# Altium PCB ControlBoard.PcbDoc (part 2 of 2)
Units mil, origin at the board's own origin, x right, y up, seen from the top; angles counter-clockwise.
Board outline 3834.27 x 1968.5 mil, 4 copper layers (TOP, GND, POWER, BOTTOM), stack 23.756 mil thick; 135 components, 144 nets, 798 pads, 277 vias.
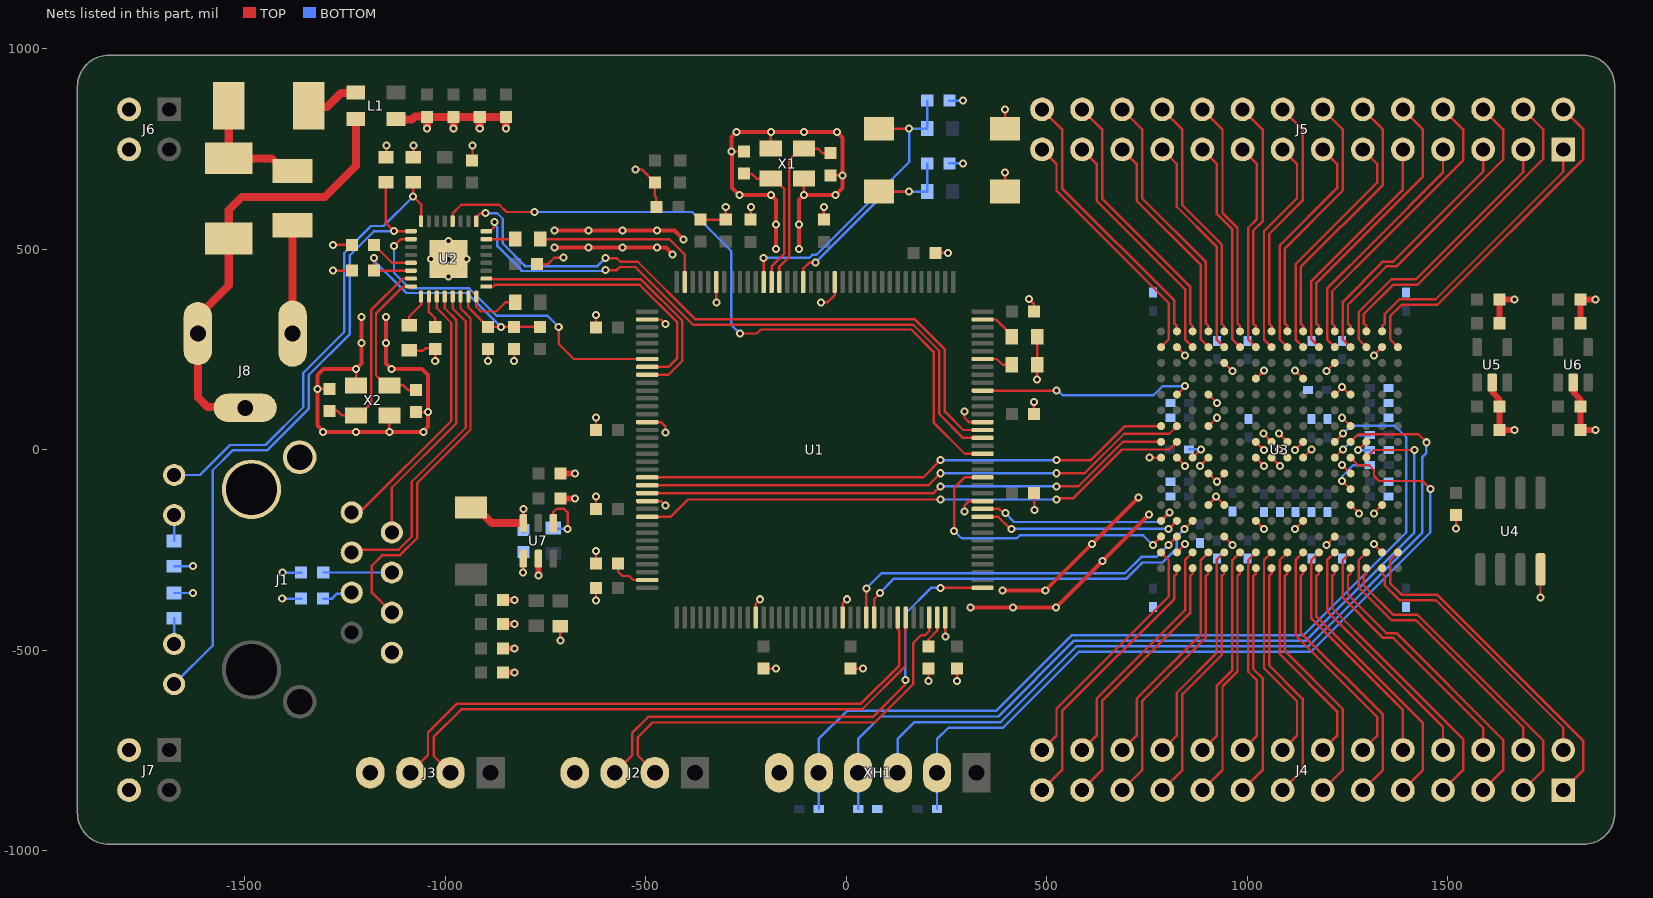
[diagram p4: the nets of this part, all layers, seen from the top]

## Via types
v1: diameter 20, hole 10, TOP to BOTTOM, tented both sides, 277 vias

## Nets (pads, with @x,y where several pads share a name; then routed paths per layer and width w, separated by ;. In a path a pad name is that pad's centre, name@x,y a point inside that pad or via, vN(x,y) a via of type N, cw(c..) or ccw(c..) an arc to the next point about the centre after c; other vN are vias at no path point) (continued)
FPGA_FSMC_DATA4: U1.58 U3.K16 | length 1334.6
  TOP w6: U1.58@-496.17,-68.9 192.33,-68.9 v1(235.38,-25.84) ; v1(524.56,-25.84) 610.43,-25.84 695.33,59.06 U3.K16@785.4,59.06
  BOTTOM w6: v1(235.38,-25.84) v1(524.56,-25.84)
FPGA_FSMC_DATA5: U1.59 U3.K15 | length 1382.1
  TOP w6: U1.59@-496.17,-88.58 205.41,-88.58 v1(235.38,-58.61) ; v1(524.56,-58.61) 594.64,-58.61 693.3,40.05 805.77,40.05 U3.K15@824.77,59.06
  BOTTOM w6: v1(235.38,-58.61) v1(524.56,-58.61)
FPGA_FSMC_DATA6: U1.60 U3.J16 | length 1334.6
  TOP w6: U1.60@-496.17,-108.27 218.03,-108.27 234.92,-91.38 v1(235.38,-91.38) ; v1(524.56,-91.38) 578.84,-91.38 689.91,19.69 U3.J16@785.4,19.69
  BOTTOM w6: v1(235.38,-91.38) v1(524.56,-91.38)
FPGA_FSMC_DATA7: U1.63 U3.J15 | length 1398.4
  TOP w6: U1.63@-496.17,-167.32 -438.04,-167.32 -394.86,-124.14 v1(235.38,-124.14) ; v1(524.56,-124.14) 527.24,-121.46 565.73,-121.46 687.88,0.68 805.77,0.68 U3.J15@824.77,19.68
  BOTTOM w6: v1(235.38,-124.14) v1(524.56,-124.14)
FPGA_NRST: U1.134 U3.M15 | length 548.5
  TOP w6: U1.134@340.44,147.64 v1(524.56,147.64) ; U3.M15@824.77,137.8 v1(845.51,158.54)
  BOTTOM w6: v1(524.56,147.64) 528.16,147.64 539.79,136 766,136 788.54,158.54 v1(845.51,158.54)
FSMC_NE1: U1.123 U3.C16 | length 735.2
  TOP w6: v1(269.14,-202.14) 269.14,-95.14 295.38,-68.9 U1.123@340.44,-68.9 ; v1(764.66,-237.28) U3.C16@785.4,-216.54
  BOTTOM w6: v1(269.14,-202.14) 288.14,-221.14 425.14,-221.14 433.14,-213.14 740.52,-213.14 v1(764.66,-237.28)
FSMC_NOE: U1.118 U3.D15 | length 507.8
  TOP w6: U1.118@340.44,-167.32 379.08,-167.32 409.66,-197.91 v1(411.77,-197.91) ; v1(804.03,-197.91) U3.D15@824.77,-177.17
  BOTTOM w6: v1(411.77,-197.91) 412.53,-197.14 v1@803.26,-197.14 ; v1@804.03,-195.2 v1@806.74,-195.2
FSMC_NWE: U1.119 U3.D16 | length 518.6
  TOP w6: U1.119@340.44,-147.64 381.39,-147.64 391.9,-158.14 v1(396.77,-158.14) ; v1@396.95,-157.96 v1@397.14,-158.14 ; U3.D16@785.4,-177.17 v1(806.14,-156.43)
  BOTTOM w6: v1(396.77,-158.14) 418.82,-180.2 782.37,-180.2 v1(806.14,-156.43)
GND: C1.1 C2.1 C3.1 C4.1 C6.2 C7.2 C8.1 C9.2 C10.2 C11.1 C12.1 C13.1 C14.1 C15.1 C16.1 C17.1 C18.1 C19.1 C20.2 C21.2 C22.1 C23.1 C24.2 C25.2 C26.1 C27.2 C28.1 C29.1 C30.1 C31.2 C32.1 C33.1 C34.1 C35.1 C36.1 C37.1 C38.1 C39.1 C40.1 C41.1 C42.1 C43.1 C44.1 C45.1 C46.1 C47.1 C48.1 C49.1 C50.1 C51.1 C52.1 C53.1 C54.1 C55.1 C56.1 C57.1 C58.1 C59.1 C60.1 C61.1 C62.1 C63.1 C64.1 C65.2 C66.1 C67.1 C68.1 C69.2 C70.1 C71.1 C72.1 C73.1 C74.1 C75.1 C76.1 C78.1 C79.1 C80.1 C81.1 C82.1 C83.1 C84.1 C85.2 C86.1 C87.2 J1.8 J1.13 J1.14 J2.4 J3.4 J6.2 J6.4 J7.2 J7.4 L1.3 R1.1 R2.1 R5.2 R6.2 R9.1 R12.2 R13.2 R17.1 R20.2 R21.1 S1.1 S2.1 U1.16 U1.31 U1.38 U1.51 U1.61 U1.83 U1.94 U1.107 U1.120 U1.130 U2.33 U3.B2 U3.B15 U3.C5 U3.C12 U3.D7 U3.D10 U3.E2 U3.E4 U3.E12 U3.E13 U3.G4 U3.G12 U3.G13 U3.H7 U3.H8 U3.H9 U3.H10 U3.H13 U3.H15 U3.H16 U3.J7 U3.J8 U3.J9 U3.J10 U3.K4 U3.K13 U3.M4 U3.M5 U3.M13 U3.N7 U3.N10 U3.P5 U3.P12 U3.R2 U3.R15 U4.4 U5.2 U6.2 U7.2 X1.2 X1.4 X2.2 X2.4 XH1.6 | length 8398.3
  TOP w6: v1(-1318.64,152.06) C84.1@-1288.09,152.06 ; v1(-1280.41,446.53) C87.2@-1232.14,446.53 ; v1(-1280.41,510.95) C25.2@-1232.14,510.95 ; X2.4@-1222,160.35 v1(-1222,201.69) ; R6.2@-1147.83,729.74 -1146.86,730.71 v1(-1146.86,758.86) ; v1(-1139.32,44.21) X2.2@-1139.32,85.54 ; R9.1@-1094.86,247.27 -1055.54,247.27 -1049.55,253.26 -1026.86,253.26 C24.2@-1024.86,251.26 v1(-1024.86,221.26) ; R5.2@-1079.51,729.74 -1078.54,730.71 v1(-1078.54,758.86) ; C85.2@-1073.23,93.83 v1(-1042.68,93.83) ; C20.2@-932.86,721.75 -931.89,722.72 v1(-931.89,758.86) ; v1(-893.39,221.26) C6.2@-893.39,251.26 ; v1(-828.26,221.26) C7.2@-828.26,251.26 ; C8.1@-770.55,462.95 -743.86,462.95 -727.95,478.86 v1(-704.59,478.86) ; v1(-712.86,-475.14) R20.2@-712.86,-439.14 ; C10.2@-623.93,-283.14 v1(-623.93,-252.14) ; v1(-623.86,-375.49) C16.1@-623.86,-344.49 ; C12.1@-623.86,-147.64 v1(-623.86,-116.64) ; C1.1@-623.86,49.21 v1(-623.86,80.21) ; C3.1@-623.86,305.12 v1(-623.86,336.12) ; v1(-524.86,698.86) -509.45,698.86 C23.1@-477.34,666.75 -477.34,632.76 -473.62,629.04 C21.2@-473.62,605.86 ; U1.61@-496.17,-127.95 -496.12,-128 -461.73,-128 v1(-450.73,-139) ; U1.51@-496.17,68.9 U1.51@-496.17,68.9 -461.73,68.85 -450.73,57.85 v1(-450.73,42.85) ; U1.38@-496.17,324.8 U1.38@-496.17,324.8 -461.73,324.76 v1(-450.73,313.76) ; C86.1@-362.86,573.86 C22.1@-300.36,573.86 v1(-300.36,604.86) ; v1(-324,366.86) v1(-324,366.86) U1.31@-323.93,418.31 U1.31@-323.93,418.31 ; v1(-285.89,743.86) -285.78,743.75 C31.2@-255.23,743.75 ; C19.1@-237.86,573.86 v1(-237.86,604.86) ; U1.83@-225.5,-418.31 -225.45,-418.26 -225.45,-383.86 v1(-214.45,-372.86) ; C14.1@-205.82,-546 v1(-174.82,-546) ; X1.2@-188.1,751 v1(-188.1,792.34) ; v1(-105.42,634.86) X1.4@-105.42,676.2 ; v1(-63,366.86) -62.08,367.78 -46.22,367.78 -29,385 -29,417.96 U1.16@-28.65,418.31 ; C11.1@-55.51,573.86 v1(-55.51,604.86) ; C30.1@-39.33,684.49 v1(-8.78,684.49) ; U1.94@-8.97,-418.31 -8.92,-418.26 -8.92,-383.86 v1(2.08,-372.86) ; C13.1@10.72,-546 v1(41.72,-546) ; v1(205.28,-577.06) C9.2@205.28,-546.06 ; C2.1@223.2,491 v1(254.2,491) ; U1.107@246.94,-418.31 246.94,-465.2 v1(247.1,-465.36) ; v1(276.63,-577) C18.1@276.63,-546 ; v1(295,-154) 295,-139 306,-128 340.4,-128 U1.120@340.44,-127.95 ; v1(295,94.95) 295,79.95 306,68.95 340.4,68.95 U1.130@340.44,68.9 ; S2.1@396.62,643.86 v1(396.62,691.62) ; S1.1@396.62,800.86 v1(396.62,848.62) ; v1(455.64,376.36) 468.14,363.86 C4.1@468.14,344.49 ; C15.1@468.14,-108.27 469.14,-109.27 v1(469.14,-150.14) ; C17.1@468.14,88.58 v1(468.14,119.58) ; v1(476.13,174.85) R1.1@476.13,211.86 R2.1@476.13,281.86 ; v1(756.68,-19.69) U3.H16@785.4,-19.69 ; U3.B15@824.77,-255.91 v1(845.51,-235.17) ; U3.H15@824.77,-19.69 v1(845.51,-40.43) ; U3.R15@824.77,255.91 v1(845.51,235.17) ; v1(882.77,-40.43) U3.H13@903.51,-19.69 ; U3.E13@903.51,-137.8 903.51,-136.74 922.14,-118.11 v1(922.14,-117.06) U3.E12@942.88,-137.8 ; U3.G13@903.51,-59.06 v1(924.25,-79.8) 924.25,-78.74 942.88,-60.11 U3.G12@942.88,-59.06 ; U3.K13@903.51,59.06 v1(924.25,79.8) ; U3.M13@903.51,137.8 v1(924.25,117.06) ; U3.C12@942.88,-216.54 v1(963.62,-237.28) ; U3.P12@942.88,216.54 v1(963.62,195.8) ; U3.D10@1021.62,-177.17 v1(1042.36,-197.91) ; U3.H10@1021.62,-19.69 v1(1042.36,-40.43) ; U3.J10@1021.62,19.68 v1(1042.36,-1.06) ; U3.N10@1021.62,177.17 v1(1042.36,197.91) ; v1(1040.25,40.43) U3.J9@1060.99,19.68 ; U3.H9@1060.99,-19.69 v1(1081.73,-40.43) ; v1(1079.62,1.05) U3.H8@1100.36,-19.69 ; v1(1079.62,40.43) U3.J8@1100.36,19.68 ; v1(1118.99,-197.91) U3.D7@1139.73,-177.17 ; v1(1118.99,-1.06) U3.J7@1139.73,19.68 ; v1(1118.99,197.91) U3.N7@1139.73,177.17 ; U3.H7@1139.73,-19.69 v1(1160.47,1.05) ; v1(1197.73,-237.28) U3.C5@1218.47,-216.54 ; v1(1197.73,195.8) U3.P5@1218.47,216.54 ; U3.M5@1218.47,137.8 1218.47,136.74 v1@1237.1,155.37 ; v1(1237.1,-38.32) U3.G4@1257.84,-59.06 ; v1(1237.1,79.8) U3.K4@1257.84,59.06 ; v1(1237.1,156.43) U3.M4@1257.84,135.69 ; U3.E4@1257.84,-137.8 v1(1278.58,-158.54) ; v1(1315.84,-235.17) U3.B2@1336.58,-255.91 ; v1(1315.84,-158.54) U3.E2@1336.58,-137.8 ; v1(1315.84,235.17) U3.R2@1336.58,255.91 ; v1(1521,-197) C64.1@1521,-162.61 ; v1(1731.61,-368.39) U4.4@1731.61,-298.39
  TOP w10: -1318.75,96.95 -1318.75,60.95 v1@-1307.31,49.51 ; -1318.64,97.06 v1(-1318.64,152.06) -1318.64,186.8 -1303.76,201.69 v1(-1222,201.69) ; v1(-1305.01,44.21) v1(-1222,44.21) v1(-1139.32,44.21) v1(-1054.01,44.21) -1054.01,46.28 -1042.57,57.72 v1@-1042.57,93.72 ; v1@-1221.04,202.64 -1208.57,215.11 v1(-1208.57,266.81) v1(-1208.57,330.95) ; v1(-1147.74,330.95) v1(-1147.74,266.81) -1147.74,215.11 v1(-1134.32,201.69) -1057.56,201.69 -1042.68,186.8 ; v1(-1042.68,93.83) -1042.68,183.58 ; v1(-727.86,503.95) v1(-642.57,503.95) v1(-557.28,503.95) v1(-471.98,503.95) -449.95,503.95 v1(-432.86,486.86) ; v1(-727.86,546.59) v1(-642.57,546.59) v1(-557.28,546.59) v1(-471.98,546.59) -428.6,546.59 v1(-405.86,523.86) ; v1(-285.89,743.86) -285.89,779.86 v1(-273.41,792.34) v1(-188.1,792.34) v1(-105.42,792.34) v1(-22.41,792.34) -8.78,778.71 v1(-8.78,684.49) -8.78,652.97 v1(-26.89,634.86) v1(-105.42,634.86) -117.89,622.39 v1(-117.89,561.74) v1(-117.89,501.08) ; v1@-285.78,743.75 -284.74,742.71 -284.74,652.97 v1(-266.63,634.86) v1(-188.1,634.86) ; v1@-190.01,636.77 v1(-188.1,634.86) ; v1(-175.63,501.08) v1(-175.63,561.74) -175.63,622.39 v1(-188.1,634.86) ; v1(310.2,-393.46) v1(522.81,-393.46) v1(755.08,-161.2) ; v1(390.15,-350.82) v1(496.46,-350.82) v1(728.73,-118.55)
  TOP w15: C80.1@-855.53,-555.88 -855.35,-555.7 -827.05,-555.7 v1(-826.86,-555.51) ; C79.1@-855.53,-495.51 -855.35,-495.33 -827.05,-495.33 v1(-826.86,-495.14) ; C81.1@-855.53,-435.14 -855.35,-434.96 -827.05,-434.96 v1(-826.86,-434.77) ; C78.1@-855.53,-374.77 -855.35,-374.59 -827.05,-374.59 v1(-826.86,-374.4) ; v1(-767.86,-313.29) U7.2@-767.86,-271.58 ; C82.1@-712.86,-121.29 v1(-676.3,-121.29) ; C83.1@-712.86,-59.58 v1(-676.3,-59.58) ; U5.2@1611.14,167.57 1612.14,166.57 1612.14,142.86 1629.14,125.86 1629.14,108.66 C66.1@1628.74,108.26 C65.2@1628.74,48.95 v1(1666.24,48.95) ; C67.1@1628.74,315.46 C68.1@1628.74,374.76 v1(1666.24,374.76) ; U6.2@1813.14,167.57 1814.14,166.57 1814.14,142.86 1831.14,125.86 1831.14,108.66 C70.1@1830.74,108.26 C69.2@1830.74,48.95 v1(1868.24,48.95) ; C71.1@1830.74,315.46 C72.1@1830.74,374.76 v1(1868.24,374.76)
  TOP w20: L1.3@-1122.67,824.81 -1121.78,823.92 -1082.86,823.92 -1075.86,830.92 -1046.39,830.92 C73.1@-1045.86,830.39 ; v1(-1045.86,800.86) C73.1@-1045.86,830.39 ; v1(-979.86,800.86) C74.1@-979.86,830.39 ; v1(-913.86,800.86) C76.1@-913.86,830.39 ; v1(-847.86,800.86) C75.1@-847.86,830.39 C76.1@-913.86,830.39 ; C73.1@-1045.86,830.39 C74.1@-979.86,830.39 ; C74.1@-979.86,830.39 C76.1@-913.86,830.39
  BOTTOM w6: R12.2@-1676.07,-357.15 v1(-1629.07,-357.15) ; R13.2@-1676.07,-290.41 v1(-1629.07,-290.41) ; v1(-1406.43,-371.5) C27.2@-1359.43,-371.5 ; v1(-1406.37,-306.5) C26.1@-1359.37,-306.5 ; C28.1@257.14,870.86 v1(291.15,870.86) ; C29.1@257.35,714.21 v1(291.36,714.21)
  other v1: 416.5,-393.46 638.95,-277.33 612.6,-234.68 -991.34,431.54 -1035.86,476.06 -991.34,476.06 -946.82,476.06 -991.34,520.58
LINK_LED: J1.12 R6.1 U2.25 | length 1609
  TOP w6: R6.1@-1147.83,666.75 -1147.83,565.17 v1(-1127.61,544.95) U2.25@-1085.32,544.95
  BOTTOM w6: J1.12@-1676.07,-584.61 -1579.86,-488.4 -1579.86,-51.14 -1530.47,-1.75 -1444.47,-1.75 -1339.86,102.86 -1339.86,186.86 -1237.86,288.86 -1237.86,484.95 -1177.85,544.95 v1(-1127.61,544.95)
NetC6_1: C6.1 C7.1 C87.1 FB1.1 U2.7 U2.30 | length 734.9
  TOP w6: v1@-1177.14,471.95 C87.1@-1177.14,446.53 U2.30@-1085.32,446.53 ; U2.7@-942.13,382.08 -942.13,355 C6.1@-893.39,306.26 v1(-860.82,306.26) C7.1@-828.26,306.26 FB1.1@-763.12,306.26
  BOTTOM w6: v1(-1177.14,477.95) -1177.14,471.13 -1096.86,390.86 -945.42,390.86 v1(-860.82,306.26)
NetC9_1: C9.1 U1.106 | length 81.9
  TOP w6: C9.1@205.28,-491.06 205.86,-490.49 205.86,-472.6 227.26,-451.2 U1.106@227.26,-418.31
NetC10_1: C10.1 U1.71 | length 102.3
  TOP w6: C10.1@-568.93,-283.14 -568.93,-304.08 -558.03,-314.97 -541.03,-314.97 -531.2,-324.8 U1.71@-496.17,-324.8
NetC24_1: C24.1 U2.2 | length 82.3
  TOP w6: U2.2@-1040.56,382.08 -1040.56,343.64 -1024.86,327.95 C24.1@-1024.86,306.26
NetC25_1: C25.1 U2.29 | length 110.3
  TOP w6: C25.1@-1177.14,510.95 -1132.41,466.21 U2.29@-1085.32,466.21
NetC26_2: C26.2 J1.4 | length 171
  BOTTOM w6: C26.2@-1304.15,-306.14 J1.4@-1133.15,-306.14
NetC27_1: C27.1 J1.5 | length 77.3
  BOTTOM w6: C27.1@-1304.22,-371.14 -1282.15,-371.14 -1269.65,-358.64 -1235.65,-358.64 J1.5@-1233.15,-356.14
NetC77_1: C77.1 L2.1 U7.6 | length 233.4
  TOP w6: U7.6@-805.06,-182.8 v1@-805.06,-148.34
  TOP w15: L2.1@-935.49,-143.63 L2.1@-923.09,-143.63 ; U7.6@-805.26,-183 U7.6@-805.06,-182.8 ; v1@-805.06,-148.34 v1(-804.86,-148.14)
  TOP w20: L2.1@-923.09,-143.63 -883.72,-183 U7.6@-805.26,-183
  BOTTOM w6: C77.1@-805.06,-199.62 v1@-805.06,-148.34
  BOTTOM w15: C77.1@-805.26,-199.82 C77.1@-805.06,-199.62 ; v1@-805.06,-148.34 v1(-804.86,-148.14)
NetC77_2: C77.2 U7.1 | length 85.9
  TOP w6: v1@-805.26,-306.04 U7.1@-805.26,-271.58
  BOTTOM w6: v1@-805.26,-306.24 C77.2@-805.26,-254.82
  other v1: -805.47,-306.24
NetD1_A: D1.A D2.K F1.2 | length 303.5
  TOP w20: D1.A@-1539.86,857.86 D2.K@-1539.86,726.89 -1432.67,726.89 -1400.64,694.86 F1.2@-1380.64,694.86
NetD1_K: D1.K L1.1 | length 133
  TOP w20: D1.K@-1339.86,857.86 -1336.86,854.86 -1294.86,854.86 -1259.86,889.86 -1224.17,889.86 L1.1@-1223.06,890.97
NetD2_A: D2.A J8.2 J8.3 L1.2 | length 1107.3
  TOP w20: J8.3@-1498.76,104.41 -1500.86,106.51 -1592.51,106.51 -1616.86,130.86 J8.2@-1616.86,289.58 -1616.86,332.89 -1539.86,409.89 D2.A@-1539.86,526.89 -1539.86,597.86 -1506.86,630.86 -1299.86,630.86 -1223.06,707.66 L1.2@-1223.06,824.75
NetF1_1: F1.1 J8.1 | length 270.3
  TOP w20: J8.1@-1380.64,289.58 F1.1@-1380.64,559.86
NetJ1_10: J1.10 R13.1 | length 64.5
  BOTTOM w6: R13.1@-1676.07,-227.42 J1.10@-1676.07,-162.95
NetJ1_11: J1.11 R12.1 | length 64.5
  BOTTOM w6: J1.11@-1676.07,-484.61 R12.1@-1676.07,-420.14
NetR1_2: R1.2 U1.138 | length 78.7
  TOP w6: U1.138@340.44,226.38 375.62,226.38 390.14,211.86 R1.2@413.14,211.86
NetR2_2: R2.2 U1.143 | length 92.4
  TOP w6: U1.143@340.44,324.8 373.44,324.8 413.14,285.11 R2.2@413.14,281.86
NetR3_2: R3.2 U2.8 | length 136.9
  TOP w6: U2.8@-922.45,382.08 -922.45,356.44 -910.86,344.86 -872.86,344.86 -849.78,367.95 R3.2@-825.55,367.95
NetR4_2: R4.2 U2.15 | length 71.8
  TOP w6: U2.15@-897.37,525.27 R4.2@-825.55,525.27
NetR9_2: R9.2 U2.1 | length 83.6
  TOP w6: R9.2@-1089.86,310.78 -1089.86,331.95 -1060.24,361.57 U2.1@-1060.24,382.08
NetR14_2: R14.2 U3.H14 | length 59.3
  TOP w6: U3.H14@864.14,-19.69 v1(884.88,1.05)
  BOTTOM w6: R14.2@854.88,1.05 v1(884.88,1.05)
NetR15_2: R15.2 U3.H5 | length 110.2
  TOP w6: U3.H5@1218.47,-19.69 v1(1239.21,1.05)
  BOTTOM w6: v1(1239.21,1.05) 1274.36,36.2 R15.2@1305.47,36.2
NetR16_2: R16.2 U3.F4 | length 120.9
  TOP w6: v1(1237.1,-77.69) U3.F4@1257.84,-98.43
  BOTTOM w6: v1(1237.1,-77.69) 1237.1,-65.93 1264.72,-38.31 R16.2@1305.47,-38.31
NetR17_2: R17.2 U3.J3 | length 58.3
  TOP w6: v1(1276.47,-1.06) U3.J3@1297.21,19.69
  BOTTOM w6: v1(1276.47,-1.06) R17.2@1305.47,-1.06
NetR19_2: R19.2 U7.4 | length 147.8
  TOP w6: U7.4@-730.46,-183 -730.86,-182.6 -730.86,-156.14 -721.86,-147.14 -703.86,-147.14 -694.86,-156.14 v1(-694.86,-197.14)
  BOTTOM w6: R19.2@-730.46,-195.3 -728.62,-197.14 v1(-694.86,-197.14)
NRST: C28.2 R10.2 S1.2 U1.25 | length 795.9
  TOP w6: U1.25@-205.84,418.33 v1(-205.86,478.54) ; S1.2@81.66,800.86 v1(157.14,800.86)
  BOTTOM w6: v1(-205.86,478.54) -92.06,478.54 -84.73,485.86 -74.83,485.86 157.14,717.83 v1(157.14,800.86) R10.2@202.14,800.86 C28.2@202.14,870.86
PHY_OSC1: C85.1 U2.32 X2.3 | length 384.2
  TOP w6: U2.32@-1085.32,407.16 -1105.65,407.16 -1172.71,340.09 -1172.71,185.87 -1147.19,160.35 X2.3@-1139.32,160.35 -1104.19,160.35 -1092.68,148.83 C85.1@-1073.23,148.83
PHY_OSC2: C84.2 U2.31 X2.1 | length 485.4
  TOP w6: C84.2@-1288.09,97.06 -1268.64,97.06 -1257.12,85.54 X2.1@-1222,85.54 -1214.12,85.54 -1184.71,114.95 -1184.71,348.09 -1105.75,427.06 U2.31@-1085.53,427.06
RMII_CRS_DV: U1.43 U2.26 | length 861.4
  TOP w6: v1(-1127.61,507.95) -1110.29,525.27 U2.26@-1085.32,525.27 ; v1(-716.86,306.26) -716.86,263.86 -679.38,226.38 U1.43@-496.17,226.38
  BOTTOM w6: v1(-1127.61,507.95) -1127.61,441.41 -1089.06,402.86 -940.45,402.86 -871.45,333.86 -744.46,333.86 v1(-716.86,306.26)
RMII_REF_CLK: R4.1 U1.35 | length 444.2
  TOP w6: R4.1@-762.56,525.27 -441.27,525.27 -402.67,486.66 U1.35@-402.67,418.31
RMII_RXD0: U1.44 U2.9 | length 689.3
  TOP w6: U2.9@-897.37,407.16 -879.86,407.16 -876.02,411 -515,411 -421,317 -421,229 -443.31,206.69 U1.44@-496.17,206.69
RMII_RXD1: U1.45 U2.10 | length 733.8
  TOP w6: U2.10@-897.37,426.84 -879.86,426.84 -878.02,425 -512.03,425 -409,321.97 -409,221.31 -443.31,187.01 U1.45@-496.17,187.01
RMII_TX_EN: U1.126 U2.20 | length 1826.6
  TOP w6: U2.20@-981.5,570.03 -981.5,589.31 -959.95,610.86 -865.2,610.86 -847.2,592.86 v1(-777.86,592.86) ; v1(-265.19,289.86) -222.86,289.86 -212.86,299.86 162.2,299.86 218,244.06 218,68 295.84,-9.84 U1.126@340.44,-9.84
  BOTTOM w6: v1(-777.86,592.86) -383.86,592.86 -286.51,495.5 -286.51,311.18 v1(-265.19,289.86)
RMII_TXD0: U1.128 U2.16 | length 1606.6
  TOP w6: U2.16@-897.37,544.95 -888.17,544.95 -877.54,555.59 v1(-877.54,567.54) ; v1(-599.92,447.86) -572.53,447.86 -564.53,455.86 -525.92,455.86 -381.92,311.86 167.17,311.86 232,247.03 232,89.2 291.67,29.53 U1.128@340.44,29.53
  BOTTOM w6: v1(-877.54,567.54) -877.54,562.7 -869.86,555.02 -869.86,507.86 -809.86,447.86 ; -809.86,445.86 v1@-599.92,445.86
RMII_TXD1: U1.129 U2.17 | length 1643.1
  TOP w6: U2.17@-922.45,570.03 -922.45,579.23 -911.81,589.86 v1(-899.86,589.86) ; v1(-599.92,477.86) -572.53,477.86 -563.53,468.86 -519.86,468.86 -376.86,325.86 170.14,325.86 246,250 246,95 291.78,49.21 U1.129@340.44,49.21
  BOTTOM w6: v1(-899.86,589.86) -870.16,589.86 -856.54,576.23 -856.54,514.54 -801.86,459.86 ; -801.86,457.86 -619.92,457.86 v1(-599.92,477.86)
RX1: J4.2 U3.A2 | length 693.6
  TOP w6: U3.A2@1336.58,-295.28 1336.58,-308.28 1342.95,-314.65 1342.95,-338.14 1379.95,-375.14 1470.17,-375.14 1788.4,-693.37 J4.2@1788.4,-748.86
RX2: J4.4 U3.B3 | length 706.4
  TOP w6: U3.B3@1297.21,-255.91 1278.21,-274.91 1278.21,-343.11 1360.24,-425.14 1421.17,-425.14 1688.4,-692.37 J4.4@1688.4,-748.86
RX3: J4.6 U3.B4 | length 660.4
  TOP w6: U3.B4@1257.84,-255.91 1238.84,-274.91 1238.84,-368.84 1339.14,-469.14 1364.34,-469.14 1588.4,-693.2 J4.6@1588.4,-748.86
RX4: J4.8 U3.B5 | length 620.5
  TOP w6: U3.B5@1218.47,-255.91 1199.47,-274.91 1199.47,-402.27 1314.44,-517.24 1488.4,-691.2 J4.8@1488.4,-748.86
RX5: J4.10 U3.B6 | length 595.4
  TOP w6: U3.B6@1179.1,-255.91 1160.1,-274.91 1160.1,-338.14 1160.14,-338.18 1160.14,-420.6 1388.4,-648.86 J4.10@1388.4,-748.86
RX6: J4.12 U3.B7 | length 600.1
  TOP w6: U3.B7@1139.73,-255.91 1120.73,-274.91 1120.73,-462.73 1324.4,-666.4 1324.4,-712.86 J4.12@1288.4,-748.86
RX7: J4.14 U3.B8 | length 575
  TOP w6: U3.B8@1100.36,-255.91 1081.36,-274.91 1081.36,-509.36 1224.4,-652.4 1224.4,-712.86 J4.14@1188.4,-748.86
RX8: J4.16 U3.B9 | length 549.9
  TOP w6: U3.B9@1060.99,-255.91 1041.99,-274.91 1041.99,-544.79 1124.4,-627.2 1124.4,-712.86 J4.16@1088.4,-748.86
RX9: J4.18 U3.B10 | length 524.8
  TOP w6: J4.18@988.4,-748.86 1024.4,-712.86 1024.4,-575.4 1002.62,-553.62 1002.62,-274.91 U3.B10@1021.62,-255.91
RX10: J4.20 U3.B11 | length 531.8
  TOP w6: J4.20@888.4,-748.86 924.4,-712.86 924.4,-587.88 963.24,-549.04 963.24,-388.24 963.25,-274.91 U3.B11@982.25,-255.91
RX11: J4.22 U3.B12 | length 556.9
  TOP w6: J4.22@788.4,-748.86 824.4,-712.86 824.4,-606.05 923.88,-506.57 923.88,-274.91 U3.B12@942.88,-255.91
RX12: J4.24 U3.B13 | length 582.1
  TOP w6: J4.24@688.4,-748.86 724.4,-712.86 724.4,-621.08 884.51,-460.97 884.51,-274.91 U3.B13@903.51,-255.91
RX13: J4.26 U3.B14 | length 607.2
  TOP w6: J4.26@588.4,-748.86 624.4,-712.86 624.4,-621.08 845.14,-400.34 845.14,-274.91 U3.B14@864.14,-255.91
RX14: J4.28 U3.B16 | length 631.7
  TOP w6: J4.28@488.4,-748.86 524.4,-712.86 524.4,-646.08 804.4,-366.08 804.4,-274.91 U3.B16@785.4,-255.91
RX15: J5.1 U3.T2 | length 693.6
  TOP w6: U3.T2@1336.58,295.28 1336.58,308.28 1342.95,314.65 1342.95,338.14 1379.95,375.14 1470.17,375.14 1788.4,693.37 J5.1@1788.4,748.86
RX16: J5.3 U3.R3 | length 706.4
  TOP w6: U3.R3@1297.21,255.91 1278.21,274.91 1278.21,343.11 1360.24,425.14 1421.17,425.14 1688.4,692.37 J5.3@1688.4,748.86
RX17: J5.5 U3.R4 | length 660.4
  TOP w6: U3.R4@1257.84,255.91 1238.84,274.91 1238.84,368.84 1339.14,469.14 1364.34,469.14 1588.4,693.2 J5.5@1588.4,748.86
RX18: J5.7 U3.R5 | length 620.5
  TOP w6: U3.R5@1218.47,255.91 1199.47,274.91 1199.47,402.27 1314.44,517.24 1488.4,691.2 J5.7@1488.4,748.86
RX19: J5.9 U3.R6 | length 595.4
  TOP w6: U3.R6@1179.1,255.91 1160.1,274.91 1160.1,338.14 1160.14,338.18 1160.14,420.6 1388.4,648.86 J5.9@1388.4,748.86
RX20: J5.11 U3.R7 | length 600.1
  TOP w6: U3.R7@1139.73,255.91 1120.73,274.91 1120.73,462.73 1324.4,666.4 1324.4,712.86 J5.11@1288.4,748.86
RX21: J5.13 U3.R8 | length 575
  TOP w6: U3.R8@1100.36,255.91 1081.36,274.91 1081.36,338.14 1081.36,509.36 1224.4,652.4 1224.4,712.86 J5.13@1188.4,748.86
RX22: J5.15 U3.R9 | length 549.9
  TOP w6: U3.R9@1060.99,255.91 1041.99,274.91 1041.99,544.79 1124.4,627.2 1124.4,712.86 J5.15@1088.4,748.86
RX23: J5.17 U3.R10 | length 524.8
  TOP w6: J5.17@988.4,748.86 1024.4,712.86 1024.4,575.4 1002.62,553.62 1002.62,274.91 U3.R10@1021.62,255.91
RX24: J5.19 U3.R11 | length 531.8
  TOP w6: J5.19@888.4,748.86 924.4,712.86 924.4,587.88 963.24,549.04 963.24,388.24 ; 963.25,388.23 963.25,274.91 U3.R11@982.25,255.91
RX25: J5.21 U3.R12 | length 556.9
  TOP w6: J5.21@788.4,748.86 824.4,712.86 824.4,606.05 923.88,506.57 923.88,274.91 U3.R12@942.88,255.91
RX26: J5.23 U3.R13 | length 582.1
  TOP w6: J5.23@688.4,748.86 724.4,712.86 724.4,621.08 884.51,460.97 884.51,274.91 U3.R13@903.51,255.91
RX27: J5.25 U3.R14 | length 607.2
  TOP w6: J5.25@588.4,748.86 624.4,712.86 624.4,621.08 845.14,400.34 845.14,274.91 U3.R14@864.14,255.91
RX28: J5.27 U3.R16 | length 631.7
  TOP w6: J5.27@488.4,748.86 524.4,712.86 524.4,646.08 804.4,366.08 804.4,274.91 U3.R16@785.4,255.91
SPEED_LED: J1.9 R5.1 U2.24 | length 1154.8
  TOP w6: R5.1@-1079.51,666.75 -1079.86,666.39 v1(-1079.86,631.95) -1060.24,612.32 U2.24@-1060.24,570.03
  BOTTOM w6: J1.9@-1676.07,-62.95 -1611.47,-62.95 -1536.66,11.86 -1447.83,11.86 -1353.86,105.83 -1353.86,191.83 -1251.86,293.83 -1251.86,490.74 -1184.66,557.95 -1153.86,557.95 v1(-1079.86,631.95)
STM32_OSC1: C30.2 U1.23 X1.1 | length 427.2
  TOP w6: U1.23@-166.45,425.17 -167.15,425.88 -167.15,455.82 -141.98,480.99 -141.98,722.32 -113.3,751 X1.1@-105.42,751 -70.29,751 -58.78,739.49 C30.2@-39.33,739.49
STM32_OSC2: C31.1 U1.24 X1.3 | length 355.4
  TOP w6: C31.1@-255.23,688.75 -254.19,687.71 -234.74,687.71 -223.23,676.2 X1.3@-188.1,676.2 -180.23,676.2 -163.54,659.51 -153.98,649.95 -153.98,489.14 -186.13,456.99 U1.24@-186.13,425.17
SWCLK: J2.3 U1.109 | length 1245.5
  TOP w6: J2.3@-577,-805.28 -534,-762.28 -534,-706.48 -493.82,-666.3 66.98,-666.3 146.2,-587.08 146.2,-576.08 v1(148.14,-574.14) ; v1(235.38,-344.49) U1.109@340.44,-344.49
  BOTTOM w6: v1(148.14,-574.14) 147.14,-573.14 147.14,-409.14 211.79,-344.49 v1(235.38,-344.49)
SWDIO: J2.2 U1.105 | length 1036.7
  TOP w6: J2.2@-477,-805.28 -520,-762.28 -520,-717.25 -483.05,-680.3 71.29,-680.3 167.14,-584.46 167.14,-482.14 187.14,-462.14 197,-462.14 207.57,-451.57 U1.105@207.57,-418.31
TCK: R21.2 U3.H3 XH1.4 | length 2108.1
  TOP w6: U3.H3@1297.21,-19.69 1316.21,-0.69 v1(1416.91,-0.69)
  BOTTOM w6: R21.2@29.71,-896 XH1.4@29.71,-805.28 29.71,-721.72 86.29,-665.14 379.54,-665.14 568.54,-476.14 1146.94,-476.14 1416.91,-206.17 v1(1416.91,-0.69)
TDI: R7.2 U3.H4 XH1.2 | length 1966
  TOP w6: U3.H4@1257.84,-19.69 1276.84,-38.69 1303.71,-38.69 1316.21,-51.19 1316.21,-65.56 1328.71,-78.06 1436.91,-78.06 v1(1456.91,-98.06)
  BOTTOM w6: R7.2@226.56,-896 XH1.2@226.56,-805.28 226.56,-721.72 255.14,-693.14 391.14,-693.14 580.14,-504.14 1158.53,-504.14 1456.91,-205.76 v1(1456.91,-98.06)
TDO: U3.J4 XH1.3 | length 2040
  TOP w6: U3.J4@1257.84,19.68 1276.84,38.69 1426.91,38.69 v1(1446.91,18.69)
  BOTTOM w6: XH1.3@128.14,-805.28 128.14,-721.72 170.71,-679.14 385.34,-679.14 574.34,-490.14 1152.74,-490.14 1436.91,-205.96 1436.91,-17.92 1446.91,-7.92 v1(1446.91,18.69)
TMS: R22.2 U3.J5 XH1.5 | length 2297.9
  TOP w6: U3.J5@1218.47,19.68 v1(1239.21,40.43)
  BOTTOM w6: R22.2@-68.71,-896 XH1.5@-68.71,-805.28 -68.71,-721.72 1.86,-651.14 373.74,-651.14 562.74,-462.14 1141.14,-462.14 1378.02,-225.26 1378.02,-224.85 1396.91,-205.96 1396.91,31.09 1368,60 1258.78,60 v1(1239.21,40.43)
TPRX_N: J1.6 U2.6 | length 946.8
  TOP w6: J1.6@-1133.15,-406.14 -1182.86,-356.43 -1182.86,-289.14 -1156.36,-262.64 -1112.36,-262.64 -1069.86,-220.14 -1069.86,-83.14 -936.86,49.86 -936.86,327.99 -961.82,352.95 U2.6@-961.82,382.08
TPRX_P: J1.3 U2.5 | length 834.1
  TOP w6: J1.3@-1233.15,-256.14 -1226.15,-249.14 -1115.83,-249.14 -1083.36,-216.67 -1083.36,-79.67 -948.86,54.83 -948.86,320.19 -981.5,352.83 U2.5@-981.5,382.08
TPTX_N: J1.2 U2.4 | length 666.9
  TOP w6: J1.2@-1133.15,-206.14 -1133.15,-94.65 -972.24,66.27 -972.24,324 -1001.19,352.95 U2.4@-1001.19,382.08
TPTX_P: J1.1 U2.3 | length 667.9
  TOP w6: J1.1@-1233.15,-156.14 -1223.78,-146.77 -1203.49,-146.77 -984.86,71.86 -984.86,316.82 -1020.87,352.83 U2.3@-1020.87,382.08
TRIGER_IN: U1.98 U3.D14 | length 938.9
  TOP w6: U1.98@69.78,-418.31 69.78,-372.89 83.73,-358.93 v1(83.73,-357.14) ; v1(843.4,-197.91) U3.D14@864.14,-177.17
  BOTTOM w6: v1(83.73,-357.14) 119.38,-321.49 698.76,-321.49 739.11,-281.14 789.14,-281.14 824.14,-246.14 824.14,-217.17 v1(843.4,-197.91)
TRIGER_OUT: U1.97 U3.C15 | length 900.5
  TOP w6: U1.97@50.09,-418.31 v1(50.09,-346.19) ; v1(804.03,-237.28) U3.C15@824.77,-216.54
  BOTTOM w6: v1(50.09,-346.19) 88.14,-308.14 695.14,-308.14 736.14,-267.14 774.16,-267.14 v1(804.03,-237.28)
TX1: J4.1 U3.B1 | length 872.6
  TOP w6: U3.B1@1375.95,-255.91 1356.95,-274.91 1356.95,-333.17 1384.92,-361.14 1473.14,-361.14 1838.4,-726.4 1838.4,-798.86 J4.1@1788.4,-848.86
TX2: J4.3 U3.A3 | length 797.6
  TOP w6: U3.A3@1297.21,-295.28 1297.21,-308.28 1290.84,-314.65 1290.84,-338.14 1363.84,-411.14 1424.14,-411.14 1738.4,-725.4 1738.4,-798.86 J4.3@1688.4,-848.86
TX3: J4.5 U3.A4 | length 752
  TOP w6: U3.A4@1257.84,-295.28 1257.84,-308.28 1251.47,-314.65 1251.47,-361.67 1346.94,-457.14 1372.14,-457.14 1638.4,-723.4 1638.4,-798.86 J4.5@1588.4,-848.86
TX4: J4.7 U3.A5 | length 712.1
  TOP w6: U3.A5@1218.47,-295.28 1218.47,-308.28 1212.1,-314.65 1212.1,-395.1 1322.24,-505.24 1538.4,-721.4 1538.4,-798.86 J4.7@1488.4,-848.86
TX5: J4.9 U3.A6 | length 687
  TOP w6: U3.A6@1179.1,-295.28 1179.1,-308.28 1172.73,-314.65 1172.73,-416.22 1438.4,-681.89 1438.4,-798.86 J4.9@1388.4,-848.86
TX6: J4.11 U3.A7 | length 661.9
  TOP w6: U3.A7@1139.73,-295.28 1139.73,-308.28 1133.36,-314.65 1133.36,-455.56 1338.4,-660.6 1338.4,-798.86 J4.11@1288.4,-848.86
TX7: J4.13 U3.A8 | length 636.7
  TOP w6: U3.A8@1100.36,-295.28 1100.36,-308.28 1093.99,-314.65 1093.99,-502.19 1238.4,-646.6 1238.4,-798.86 J4.13@1188.4,-848.86
TX8: J4.15 U3.A9 | length 611.6
  TOP w6: U3.A9@1060.99,-295.28 1060.99,-308.28 1054.62,-314.65 1054.62,-537.62 1138.4,-621.4 1138.4,-798.86 J4.15@1088.4,-848.86
TX9: J4.17 U3.A10 | length 586.5
  TOP w6: J4.17@988.4,-848.86 1038.4,-798.86 1038.4,-569.6 1015.25,-546.45 1015.25,-314.65 1021.62,-308.28 U3.A10@1021.62,-295.28
TX10: J4.19 U3.A11 | length 593.8
  TOP w6: J4.19@888.4,-848.86 938.4,-798.86 938.4,-590.85 975.88,-553.37 975.88,-314.65 982.25,-308.28 U3.A11@982.25,-295.28 U3.A11@981.31,-296.21
TX11: J4.21 U3.A12 | length 617.6
  TOP w6: J4.21@788.4,-848.86 838.4,-798.86 838.4,-609.88 936.51,-511.77 936.51,-314.65 942.88,-308.28 U3.A12@942.88,-295.28
TX12: J4.23 U3.A13 | length 642.7
  TOP w6: J4.23@688.4,-848.86 738.4,-798.86 738.4,-626.88 897.14,-468.14 897.14,-314.65 903.51,-308.28 U3.A13@903.51,-295.28
TX13: J4.25 U3.A14 | length 667.8
  TOP w6: J4.25@588.4,-848.86 638.4,-798.86 638.4,-626.88 857.77,-407.51 857.77,-314.65 864.14,-308.28 U3.A14@864.14,-295.28
TX14: J4.27 U3.A15 | length 692.9
  TOP w6: J4.27@488.4,-848.86 538.4,-798.86 538.4,-651.88 818.4,-371.88 818.4,-314.65 824.77,-308.28 U3.A15@824.77,-295.28
TX15: J5.2 U3.R1 | length 873.2
  TOP w6: U3.R1@1375.95,255.91 1356.95,274.91 1356.95,333.17 1384.92,361.14 1474.14,361.14 1838.4,725.4 1838.4,798.86 J5.2@1788.4,848.86
TX16: J5.4 U3.T3 | length 797.6
  TOP w6: U3.T3@1297.21,295.28 1297.21,308.28 1290.84,314.65 1290.84,338.14 1363.84,411.14 1424.14,411.14 1738.4,725.4 1738.4,798.86 J5.4@1688.4,848.86
TX17: J5.6 U3.T4 | length 752
  TOP w6: U3.T4@1257.84,295.28 1257.84,308.28 1251.47,314.65 1251.47,361.67 1346.94,457.14 1372.14,457.14 1638.4,723.4 1638.4,798.86 J5.6@1588.4,848.86
TX18: J5.8 U3.T5 | length 712.1
  TOP w6: U3.T5@1218.47,295.28 1218.47,308.28 1212.1,314.65 1212.1,395.1 1322.24,505.24 1538.4,721.4 1538.4,798.86 J5.8@1488.4,848.86
TX19: J5.10 U3.T6 | length 687
  TOP w6: U3.T6@1179.1,295.28 1179.1,308.28 1172.73,314.65 1172.73,416.22 1438.4,681.89 1438.4,798.86 J5.10@1388.4,848.86
TX20: J5.12 U3.T7 | length 661.9
  TOP w6: U3.T7@1139.73,295.28 1139.73,308.28 1133.36,314.65 1133.36,455.56 1338.4,660.6 1338.4,798.86 J5.12@1288.4,848.86
TX21: J5.14 U3.T8 | length 636.7
  TOP w6: U3.T8@1100.36,295.28 1100.36,308.28 1093.99,314.65 1093.99,502.19 1238.4,646.6 1238.4,798.86 J5.14@1188.4,848.86
TX22: J5.16 U3.T9 | length 611.6
  TOP w6: U3.T9@1060.99,295.28 1060.99,308.28 1054.62,314.65 1054.62,537.62 1138.4,621.4 1138.4,798.86 J5.16@1088.4,848.86
TX23: J5.18 U3.T10 | length 586.5
  TOP w6: J5.18@988.4,848.86 1038.4,798.86 1038.4,569.6 1015.25,546.45 1015.25,314.65 1021.62,308.28 U3.T10@1021.62,295.28
TX24: J5.20 U3.T11 | length 593.8
  TOP w6: J5.20@888.4,848.86 938.4,798.86 938.4,590.85 975.88,553.37 975.88,314.65 982.25,308.28 U3.T11@982.25,295.28 U3.T11@981.31,296.21
TX25: J5.22 U3.T12 | length 617.6
  TOP w6: J5.22@788.4,848.86 838.4,798.86 838.4,609.88 936.51,511.77 936.51,314.65 942.88,308.28 U3.T12@942.88,295.28
TX26: J5.24 U3.T13 | length 642.7
  TOP w6: J5.24@688.4,848.86 738.4,798.86 738.4,626.88 897.14,468.14 897.14,314.65 903.51,308.28 U3.T13@903.51,295.28
TX27: J5.26 U3.T14 | length 667.8
  TOP w6: J5.26@588.4,848.86 638.4,798.86 638.4,626.88 857.77,407.51 857.77,314.65 864.14,308.28 U3.T14@864.14,295.28
TX28: J5.28 U3.T15 | length 692.9
  TOP w6: J5.28@488.4,848.86 538.4,798.86 538.4,651.88 818.4,371.88 818.4,314.65 824.77,308.28 U3.T15@824.77,295.28
USART1_RX: J3.2 U1.102 | length 1477.8
  TOP w6: J3.2@-986.86,-805.28 -1028.86,-763.28 -1028.86,-716.25 -959.76,-647.14 40.14,-647.14 146.67,-540.61 146.67,-449.65 148.52,-447.81 U1.102@148.52,-418.31
USART1_TX: J3.3 U1.101 | length 1484
  TOP w6: J3.3@-1086.86,-805.28 -1042.86,-761.28 -1042.86,-705.48 -970.53,-633.14 37.17,-633.14 132.67,-537.64 132.67,-451.65 128.83,-447.81 U1.101@128.83,-418.31
USER_KEY: C29.2 R11.2 S2.2 U1.20 | length 567.8
  TOP w6: U1.20@-107.39,418.31 -107.39,451.33 -91.86,466.86 v1(-76.86,466.86) ; S2.2@81.66,643.86 v1(157.14,643.86)
  BOTTOM w6: v1(-76.86,466.86) 100.14,643.86 v1(157.14,643.86) R11.2@202.14,643.86 C29.2@202.14,713.86
pads on no net: J1.7 J1.15 J1.16 U1.1 U1.2 U1.3 U1.4 U1.5 U1.7 U1.8 U1.9 U1.18 U1.21 U1.22 U1.26 U1.28 U1.29 U1.34 U1.37 U1.40 U1.41 U1.42 U1.46 U1.47 U1.48 U1.49 U1.53 U1.54 U1.55 U1.56 U1.57 U1.64 U1.65 U1.66 U1.67 U1.68 U1.69 U1.70 U1.73 U1.74 U1.75 U1.76 U1.77 U1.78 U1.79 U1.80 U1.81 U1.82 U1.87 U1.88 U1.89 U1.90 U1.91 U1.92 U1.93 U1.96 U1.99 U1.103 U1.104 U1.110 U1.111 U1.112 U1.113 U1.116 U1.117 U1.122 U1.124 U1.125 U1.127 U1.132 U1.133 U1.135 U1.136 U1.137 U1.139 U1.140 U1.141 U1.142 U2.11 U2.12 U2.13 U2.18 U2.19 U2.27 U2.28 U3.C2 U3.C3 U3.C6 U3.C8 U3.C9 U3.C11 U3.C14 U3.D1 U3.D3 U3.D4 U3.D5 U3.D6 U3.D8 U3.D9 U3.D11 U3.D12 U3.E1 U3.E5 U3.E6 U3.E7 U3.E8 U3.E9 U3.E10 U3.E11 U3.E15 U3.F1 U3.F2 U3.F3 U3.F5 U3.F6 U3.F7 U3.F8 U3.F9 U3.F10 U3.F11 U3.F13 U3.F14 U3.G1 U3.G2 U3.G5 U3.G11 U3.J1 U3.J2 U3.J6 U3.J11 U3.J12 U3.J13 U3.J14 U3.K1 U3.K2 U3.K5 U3.K6 U3.K8 U3.K9 U3.K10 U3.K11 U3.K12 U3.L1 U3.L2 U3.L3 U3.L4 U3.L6 U3.L7 U3.L8 U3.L9 U3.L10 U3.L11 U3.L12 U3.L13 U3.L14 U3.M1 U3.M2 U3.M6 U3.M7 U3.M8 U3.M9 U3.M10 U3.M11 U3.M12 U3.M16 U3.N1 U3.N2 U3.N3 U3.N5 U3.N6 U3.N8 U3.N9 U3.N11 U3.N12 U3.N13 U3.N14 U3.P1 U3.P2 U3.P3 U3.P6 U3.P8 U3.P9 U3.P11 U5.4 U6.4

## Polygon pours and split planes (outlines as drawn)
GND on GND "NONET_L-01_P-001" (solid, remove dead copper, pour order 0): -1917.14,-905.51 -1917.14,905.51 cw(c-1838.4,905.51) -1838.4,984.25 1838.4,984.25 cw(c1838.4,905.51) 1917.14,905.51 1917.14,-905.51 cw(c1838.4,-905.51) 1838.4,-984.25 -1838.4,-984.25 cw(c-1838.4,-905.51)
GND on BOTTOM "NONET_L-01_P-001" (solid, remove dead copper, pour order 3): -1917.14,-905.51 -1917.14,905.51 cw(c-1838.4,905.51) -1838.4,984.25 1838.4,984.25 cw(c1838.4,905.51) 1917.14,905.51 1917.14,-905.51 cw(c1838.4,-905.51) 1838.4,-984.25 -1838.4,-984.25 cw(c-1838.4,-905.51)
3V3 on POWER "NONET_L-01_P-001" (solid, remove dead copper, pour order 2): -1917.14,-905.51 -1917.14,905.51 cw(c-1838.4,905.51) -1838.4,984.25 1838.4,984.25 cw(c1838.4,905.51) 1917.14,905.51 1917.14,-905.51 cw(c1838.4,-905.51) 1838.4,-984.25 -1838.4,-984.25 cw(c-1838.4,-905.51)

## Keep-outs
Keep-Out Layer:
  the board outline again, w10

## Silkscreen, mask and mechanical layers (free items; w line width, h text height)
Top Overlay:
  drawing of 74 lines, arcs and shapes, not listed
  text "Designed by" at -557.63,893.28 h60
  text "NRST" at 168.38,878.79 h60
  text "Jiaxin Qian" at -536.94,843.53 h60
  text "2025.10.10" at -536.94,787.38 h60
  text "T28" at 521.53,691 h30 r180
  text "T27" at 621.53,691 h30 r180
  text "T26" at 720.82,691 h30 r180
  text "T25" at 821.53,691 h30 r180
  text "T24" at 922.25,691 h30 r180
  text "T23" at 1021.53,691 h30 r180
  text "T22" at 1121.53,691 h30 r180
  text "T21" at 1215.11,691 h30 r180
  text "T20" at 1321.53,691 h30 r180
  text "T19" at 1418.46,691 h30 r180
  text "T18" at 1519.18,691 h30 r180
  text "T17" at 1619.18,691 h30 r180
  text "T16" at 1718.46,691 h30 r180
  text "T15" at 1819.18,691 h30 r180
  text "GND" at -1803.39,688 h30 r270
  text "3V3" at -1703.39,688 h30 r270
  text "R28" at 523.1,639 h30 r180
  text "R27" at 623.1,639 h30 r180
  text "R26" at 722.39,639 h30 r180
  text "R25" at 823.1,639 h30 r180
  text "R24" at 923.82,639 h30 r180
  text "R23" at 1023.1,639 h30 r180
  text "R22" at 1123.1,639 h30 r180
  text "R21" at 1216.68,639 h30 r180
  text "R20" at 1323.1,639 h30 r180
  text "R19" at 1420.03,639 h30 r180
  text "R18" at 1520.75,639 h30 r180
  text "R17" at 1620.75,639 h30 r180
  text "R16" at 1720.03,639 h30 r180
  text "R15" at 1820.75,639 h30 r180
  text "USER" at 167.36,532.79 h60
  text "R14" at 455.33,-639 h30
  text "R13" at 556.05,-639 h30
  text "R12" at 656.05,-639 h30
  text "R11" at 762.47,-639 h30
  text "R10" at 856.05,-639 h30
  text "R09" at 954.4,-639 h30
  text "R08" at 1053.69,-639 h30
  text "R07" at 1153.69,-639 h30
  text "R06" at 1254.4,-639 h30
  text "R05" at 1353.69,-639 h30
  text "R04" at 1452.98,-639 h30
  text "R03" at 1553.69,-639 h30
  text "R02" at 1653.69,-639 h30
  text "R01" at 1760.12,-639 h30
  text "T14" at 456.9,-691 h30
  text "T13" at 557.62,-691 h30
  text "T12" at 657.62,-691 h30
  text "T11" at 764.05,-691 h30
  text "T10" at 857.62,-691 h30
  text "T09" at 955.98,-691 h30
  text "T08" at 1055.26,-691 h30
  text "T07" at 1155.26,-691 h30
  text "T06" at 1255.98,-691 h30
  text "T05" at 1355.26,-691 h30
  text "T04" at 1454.55,-691 h30
  text "T03" at 1555.26,-691 h30
  text "T02" at 1655.26,-691 h30
  text "T01" at 1761.69,-691 h30
  text "G" at -1195.57,-939 h30
  text "Tx" at -1104.5,-939 h30
  text "Rx" at -1006.07,-939 h30
  text "3V3" at -921.57,-939 h30
  text "G" at -685.71,-939 h30
  text "CLK" at -610.14,-939 h30
  text "DIO" at -502.92,-939 h30
  text "3V3" at -411.71,-939 h30
  text "G" at -175.85,-939 h30
  text "TMS" at -104.21,-939 h30
  text "TCK" at -4.99,-939 h30
  text "TDO" at 93.57,-939 h30
  text "TDI" at 203.42,-939 h30
  text "2V5" at 290.28,-939 h30
Mechanical 1:
  the board outline again, w40

## Text inside footprints (layer, text, board x,y; h text height)
J1: Top Overlay "RefDes" at -1488.07,-398.78 h50 r90; Top Overlay "REFDES" at -1488.07,-411.28 h50 r90; Mechanical 13 "RefDes2" at -1488.07,-411.28 h50 r90
U1: Top Overlay "REFDES" at -102.86,87.5 h50 r270; Top Overlay "RefDes" at -102.86,75 h50 r270; Mechanical 13 "RefDes2" at -102.86,87.5 h50 r270
U3: Top Overlay "REFDES" at 1168.17,25 h50 r180; Top Overlay "RefDes" at 1155.67,25 h50 r180; Top Overlay "16" at 760.4,-359.5 h50 r270; Top Overlay "1" at 1350.95,-359.5 h50 r270; Top Overlay "T" at 1465.17,320.28 h50 r180; Top Overlay "A" at 1465.17,-270.28 h50 r180; Mechanical 13 "RefDes2" at 1168.17,25 h50 r180; Mechanical 13 "16" at 760.4,-359.5 h50 r270; Mechanical 13 "1" at 1350.95,-359.5 h50 r270; Mechanical 13 "T" at 1465.17,320.28 h50 r180; Mechanical 13 "A" at 1465.17,-270.28 h50 r180; Bottom Overlay "16" at 810.4,-359.5 h50 r90; Bottom Overlay "1" at 1400.95,-359.5 h50 r90; Bottom Overlay "T" at 1440.17,320.28 h50 r180; Bottom Overlay "A" at 1440.17,-270.28 h50 r180